# Altium PCB PCB.PcbDoc
Units mm, origin at the board's own origin, x right, y up, seen from the top; angles counter-clockwise.
Board outline 31.88 x 30.1 mm, 2 copper layers (Top Layer, Bottom Layer), stack 1.569 mm thick; 10 components, 10 nets, 42 pads, 0 vias.
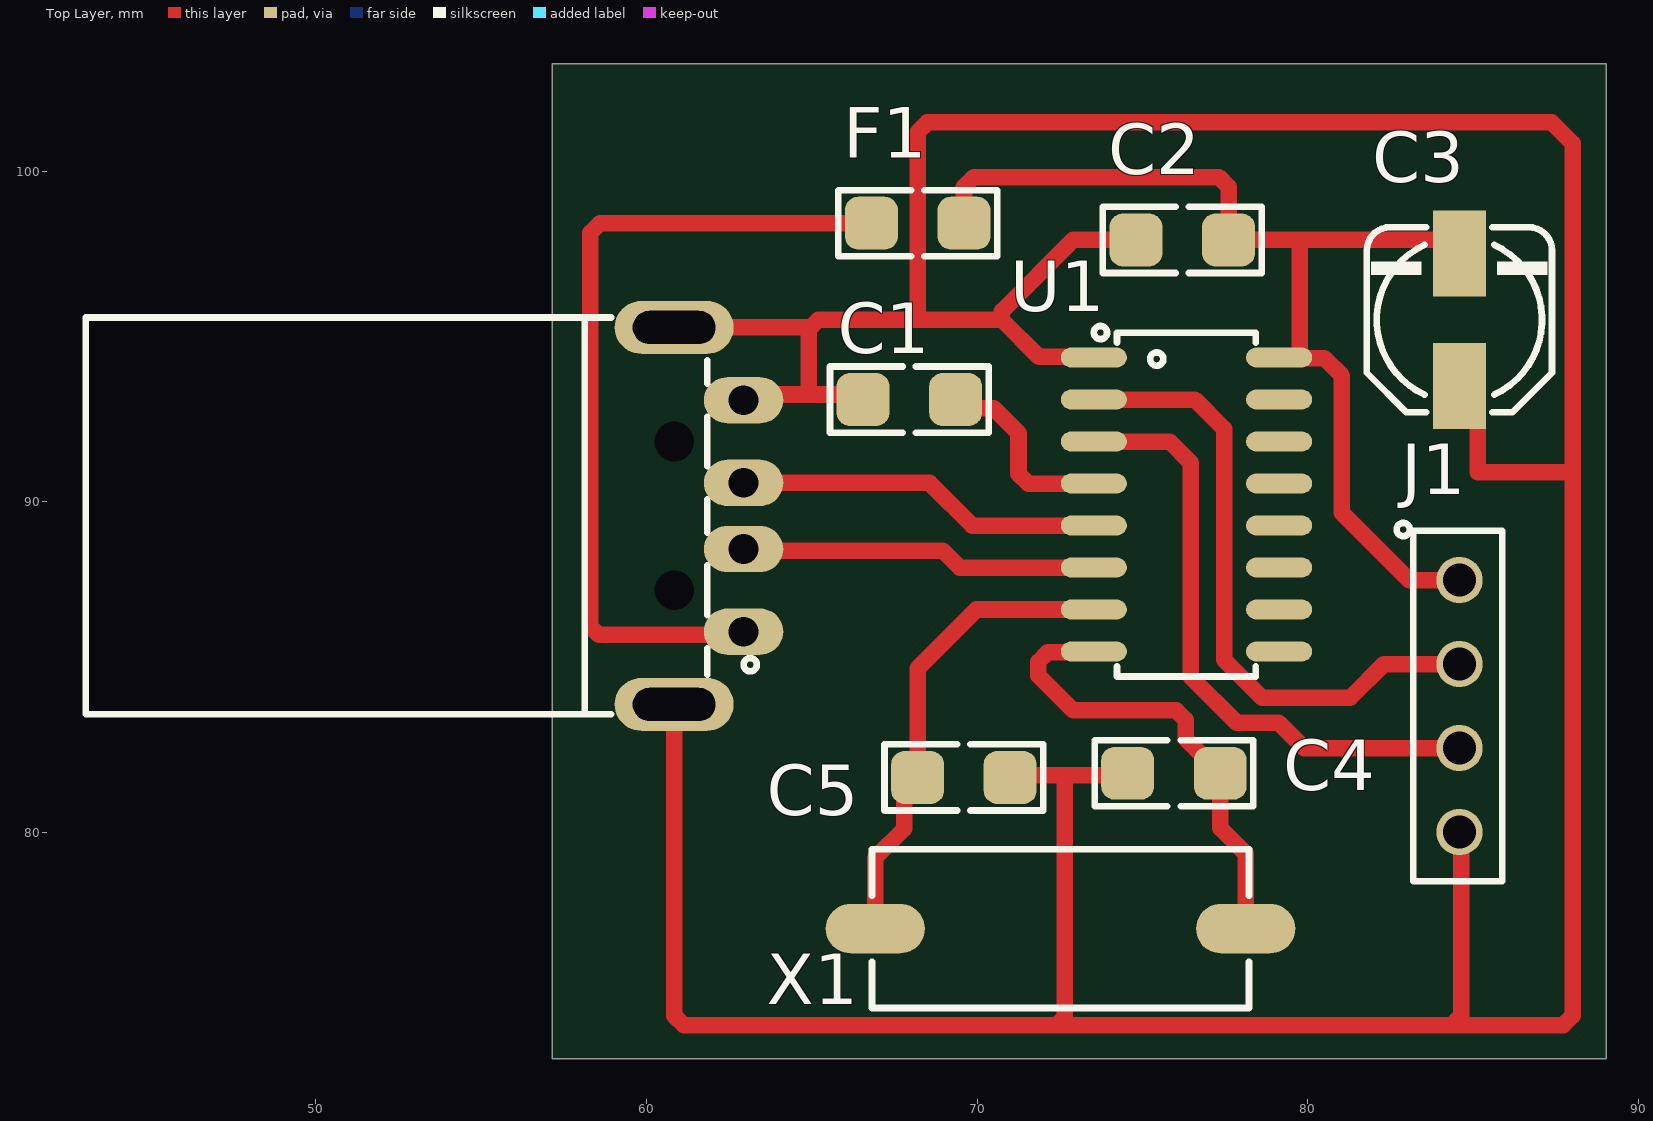
[diagram p0: Top Layer view]
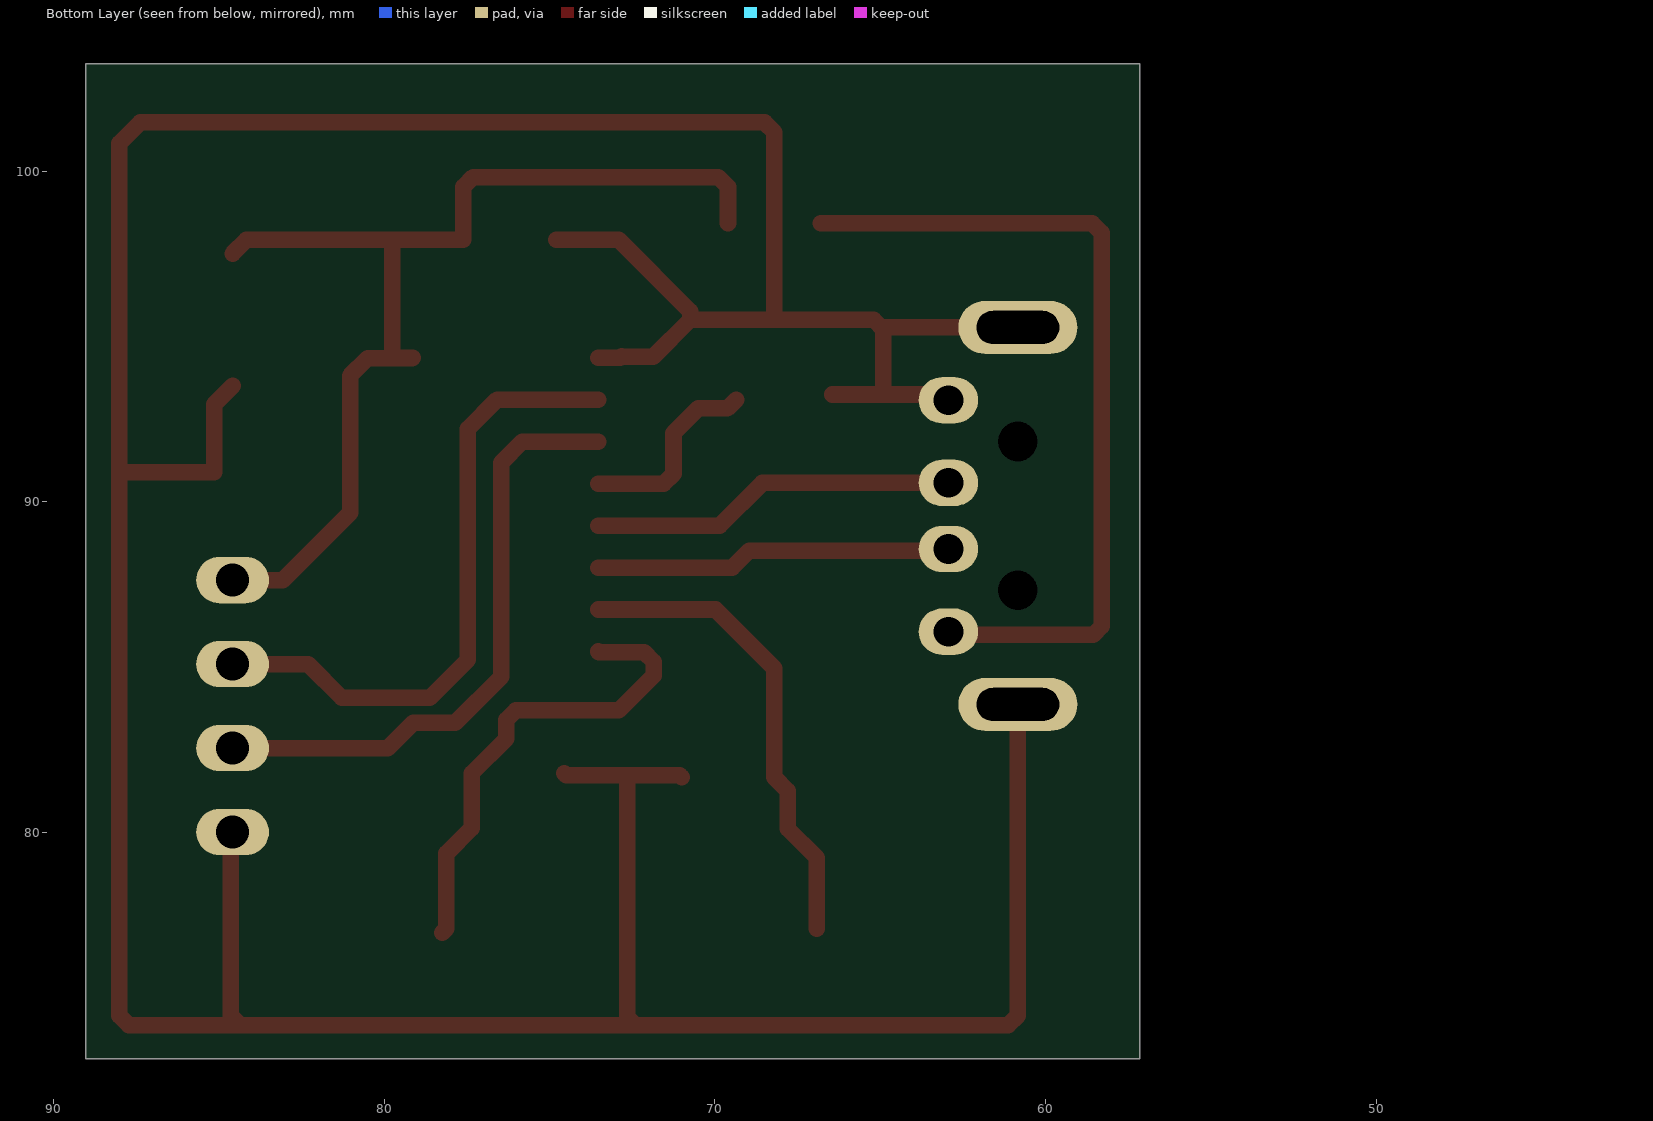
[diagram p1: Bottom Layer view, seen from below]

## Layer stack, top to bottom
Top Solder: solder mask 0.0254, SM-001, Dk 4
Top Layer: signal copper 0.035
Dielectric 1: core 1.4986, Core-043, Dk 4.3
Bottom Layer: signal copper 0.035
Bottom Solder: solder mask 0.0254, SM-001, Dk 4

## Board outline
57.15,73.152 89.027,73.152 89.027,103.251 57.15,103.251

## Design rules (kind name [scope] priority, off if disabled: settings)
Clearance [All] p1: gap=0.254 ignorepadtopadclearanceinfootprint=FALSE except(0: Arc-Hole Track-Hole SMDPad-Hole THPad-Hole Via-Hole Fill-Hole Poly-Hole Region-Hole Text-Hole)
PolygonConnect [All] p1: connectstyle=Relief reliefconductorwidth=0.254 reliefentries=4 polygonreliefangle="90 Angle" airgapwidth=0.254
RoutingVias [All] p1: holewidth=0.711 width=1.27 viastyle="Through Hole" minholewidth=0.711 minwidth=1.27 maxholewidth=0.711 maxwidth=1.27
SolderMaskExpansion [All] p1: expansion=0.102 istentingtop=FALSE
Width [All] p1: maxlimit=0.5 minlimit=0.254 preferedwidth=0.254
30 further rules are at their usual default settings.

## Classes and differential pairs
component class Sheet: C1 C2 C3 C4 C5 F1 J1 U1 X1

## Components (designator, comment, footprint, x,y, rotation, side; value= is the part's Value field where it differs from the comment)
C1 "10nF" C1206 67.945,93.091 r0 top
C2 "100nF" C1206 76.2,97.917 r0 top
C3 "10uF" C_EL_5 84.582,95.504 r90 top
C4 "10nF" C1206 75.949,81.788 r0 top
C5 "10nF" C1206 69.596,81.661 r180 top
F1 "FUSE3A_1206" F1206 68.199,98.425 r0 top
J1 "HDRF4" HDR_F_1X4 84.582,83.82 r270 top
PUSB1 "CONN_USB_A" USB_A_PLG_RA 62.133,89.571 r90 top locked
U1 "CH340G" SO_16 76.327,89.916 r0 top
X1 "XTL_12MHz" XTL_2_11X5 72.517,77.089 r180 top

## Footprints (in the part's own frame and the unit in brackets; to place one, negate y for a bottom-side part, rotate by r counter-clockwise, add the part's x,y. Pads: shape width x height; smd on the part's side, far side on the other; paste and mask are expansions set on the pad)
C1206 [mm] "CHIP Capacitor, 3.2X1.6mm, 1206"
  rrect50% 1.6x1.6 smd mask+0.075: 1(-1.4,0) 2(1.4,0)
  Top Layer pour cut-out: -0.8,1 -0.8,-1 0.8,-1 0.8,1
  silkscreen extent -2.4,-1 2.4,1, body extent -1.6,-0.8 1.6,0.8, height 1
C_EL_5 [mm] "Electrolytic Cap, D: 5.0mm, L: 5.8mm, Size C"
  rect 2.6x1.6 smd: 1(-2,0) 2(2,0)
  Top Layer pour cut-out: 1.905,2.667 1.905,-2.7 -1.905,-2.7 -1.905,2.667
  silkscreen extent -2.8,-2.8 2.8,2.8, body extent -3,-2.65 3,2.65
F1206 [mm] "FUSE, 1206, 3.2x1.6mm"
  rrect50% 1.6x1.6 smd mask+0.075: 1(-1.4,0) 2(1.4,0)
  Top Layer pour cut-out: -0.8,1 -0.8,-1 0.8,-1 0.8,1
  silkscreen extent -2.4,-1 2.4,1, body extent -1.6,-0.8 1.6,0.8, height 1
HDR_F_1X4 [mm] "HEADER FEMALE pitch: 2.54mm"
  round 1.4 / inner round 1.4 / far side oval 1.4x2.2 hole 1 mask+0.1: 1(-3.81,0) 2(-1.27,0) 3(1.27,0) 4(3.81,0)
  silkscreen extent -5.54,-1.9 5.3,1.3, body extent -5.2,-1.3 5.21,1.2, height 8.5
SO_16 [mm] "SOP, SOIC, 3.9mm width, 1.27mm pitch,"
  oval 2x0.6 smd: 1(-2.8,4.445) 2(-2.8,3.175) 3(-2.8,1.905) 4(-2.8,0.635) 5(-2.8,-0.635) 6(-2.8,-1.905) 7(-2.8,-3.175) 8(-2.8,-4.445) 9(2.8,-4.445) 10(2.8,-3.175) 11(2.8,-1.905) 12(2.8,-0.635) 13(2.8,0.635) 14(2.8,1.905) 15(2.8,3.175) 16(2.8,4.445)
  silkscreen extent -2.8,-5.2 2.1,5.4, body extent -3.1,-4.95 3.1,4.95, height 1.7
USB_A_PLG_RA [mm] "CONN, USB, Type A, PLUG, Right Angle, SMD, THD"
  oval 1.4x2.4 / inner oval 1.4x1.8 / far side oval 1.4x1.8 hole 0.9 mask+0.1: 1(-3.5,-0.8) 2(-1,-0.8) 3(1,-0.8) 4(3.5,-0.8)
  oval 1.6x3.6 hole 1 slot 2.5 at 90 deg: SH1(-5.7,1.3) SH2(5.7,1.3)
  round 0.8 hole 1.2 unplated: ""(-2.25,1.3) ""(2.25,1.3)
  silkscreen extent -6,-1.2 6,19.1, body extent -6.3,-1.3 6.3,19, height 3.13
XTL_2_11X5 [mm] "SMD crystal resonator, ABL, ABLS, HC-49, HC49 11X4.5MM"
  oval 3x1.5 smd: 1(-5.6,0) 2(5.6,0)
  silkscreen extent -5.7,-2.4 5.7,2.4, body extent -6.4,-2.41 6.4,2.42, height 4.3

## Part data
C1 C2 C4 C5: library part CAP_SMD_FILM, "CAP, FILM, 680nF, 16V, Acryl, 20%, 1206", ASSEMBLY=ASSEMBLY, DESC=-, MANF=Murata, MANF_P#=-, PARAM="Acrylic, MetallizedStacked, 20%, -40~85oC", PARAM2=16V, PRICE="100= 40$"
C3: library part CAP_SMD_EL, "CAP, THD, ELEC,", ASSEMBLY=ASSEMBLY, DESC=DESCRIPTION, DIST#=MOUSER, MANF=MANF, MANF_P#=MANF_PART#, PARAM=20%, PARAM2=-V, PRICE="10= -$"
F1: library part FUSE_3A_1206_SLOW, "Fuse, 3A, 32VDC, 1206, SMD, Slow Blow", MANF=Bourns, MANF_P#=SF-1206SP300-2, PARAM="3A; 32VDC; Slow Blow", PARAM2=0.027Ohm, PRICE=0.9$
J1: library part HDR_F_1X4, "CONN, HEADER, Female, pitch: 2.54mm, 4POS"
PUSB1: library part CONN_USB_A_PLUG, "CONN, USB, A, PLUG, THD"
U1: library part CH340G_SOP16, "USB-UART", MANF_P#=CH340G
X1: library part XTL_2_HC49_8MHz_SMD, "Crystal MOST POPULAR ABL HC49 PACKAGE", MANF=ABRACON, MANF_P#=ABLS-8.000MHZ-B4-T, PARAM="8MHz, 18pF, 30PPM, -20~70oC", PRICE=0.3$

## Nets (pads, with @x,y where several pads share a name; then routed paths per layer and width w, separated by ;. In a path a pad name is that pad's centre, name@x,y a point inside that pad or via, vN(x,y) a via of type N, cw(c..) or ccw(c..) an arc to the next point about the centre after c; other vN are vias at no path point)
+3.3: C1.2 U1.4 | length 6
  Top Layer w0.5: C1.2 69.615,92.821 70.501,92.821 71.247,92.075 71.247,90.844 71.54,90.551 U1.4
+5: C2.2 C3.2 F1.2 J1.1 U1.16 | length 32.9
  Top Layer w0.5: F1.2 69.599,99.526 69.892,99.819 77.307,99.819 77.6,99.526 C2.2 79.756,97.917 ; J1.1 83.058,87.63 81.026,89.662 81.026,93.814 80.498,94.342 79.146,94.342 U1.16 79.71,94.361 79.756,94.407 79.756,97.917 ; C3.2 84.169,97.917 79.756,97.917
GND: C1.1 C2.1 C3.1 C4.1 C5.1 J1.4 PUSB1.4 PUSB1.SH1 PUSB1.SH2 U1.1 | length 136.2
  Top Layer w0.5: PUSB1.SH1 60.833,74.461 61.126,74.168 72.39,74.168 ; PUSB1.SH2 64.837,95.271 64.897,95.211 ; PUSB1.4 63.105,93.243 64.774,93.243 ; C1.1@66.443,93.243 64.774,93.243 ; C5.1 71.059,81.724 72.644,81.724 ; U1.1 72.854,94.361 72.808,94.407 72.781,94.38 71.863,94.38 70.739,95.504 ; C4.1 74.486,81.724 72.644,81.724 ; C2.1 72.898,97.917 70.739,95.758 70.739,95.504 ; J1.4 84.637,79.955 84.637,74.461 84.344,74.168 ; C3.1 85.132,92.954 85.132,90.89 87.969,90.89 88.011,90.932 ; 64.774,93.243 64.897,93.366 64.897,95.211 ; 64.897,95.211 65.19,95.504 68.199,95.504 ; 68.199,95.504 70.739,95.504 ; 68.199,95.504 68.199,101.18 68.492,101.473 87.376,101.473 88.011,100.838 88.011,90.932 ; 72.39,74.168 84.344,74.168 ; 72.39,74.168 72.644,74.422 72.644,81.724 ; 84.344,74.168 87.718,74.168 88.011,74.461 88.011,90.932
NetC4_2: C4.2 U1.8 X1.1 | length 14.5
  Top Layer w0.5: U1.8 73.508,85.452 72.139,85.452 71.846,85.159 71.846,84.745 72.898,83.693 76.015,83.693 76.308,83.4 76.308,82.829 C4.2 77.349,80.131 78.117,79.363 X1.1 X1.1@78.244,76.962
NetC5_2: C5.2 U1.7 X1.2 | length 14.5
  Top Layer w0.5: X1.2 66.917,79.236 67.792,80.111 67.792,81.257 C5.2 68.196,84.96 69.977,86.741 U1.7
NetF1_1: F1.1 PUSB1.1 | length 25.3
  Top Layer w0.5: PUSB1.1 62.841,85.979 58.547,85.979 58.293,86.233 58.293,98.132 58.586,98.425 F1.1
NetJ1_2: J1.2 U1.2 | length 19.3
  Top Layer w0.5: U1.2 76.581,93.091 77.47,92.202 77.47,85.217 78.613,84.074 81.28,84.074 82.296,85.09 J1.2
NetJ1_3: J1.3 U1.3 | length 18.7
  Top Layer w0.5: U1.3 75.819,91.821 76.454,91.186 76.454,84.709 77.851,83.312 79.121,83.312 79.883,82.55 J1.3
NetPUSB1_2: PUSB1.2 U1.6 | length 10.8
  Top Layer w0.5: PUSB1.2 62.985,88.519 68.961,88.519 69.469,88.011 U1.6
NetPUSB1_3: PUSB1.3 U1.5 | length 11.1
  Top Layer w0.5: PUSB1.3 68.56,90.571 69.85,89.281 U1.5
pads on no net: PUSB1. U1.9 U1.10 U1.11 U1.12 U1.13 U1.14 U1.15

## Text inside footprints (layer, text, board x,y; h text height)
PUSB1: Mechanical 1 "PCB Edge" at 57.66,94.744 h0.25 r270